# Altium PCB bs.PcbDoc (part 2 of 2)
Units mm, origin at the board's own origin, x right, y up, seen from the top; angles counter-clockwise.
Board outline 26 x 26 mm, 4 copper layers (Top Layer, Int1 (GND), Int2 (PWR), Bottom Layer), stack 0.801 mm thick; 54 components, 41 nets, 239 pads, 117 vias.
Unrouted connection lines stored in the file: 12.
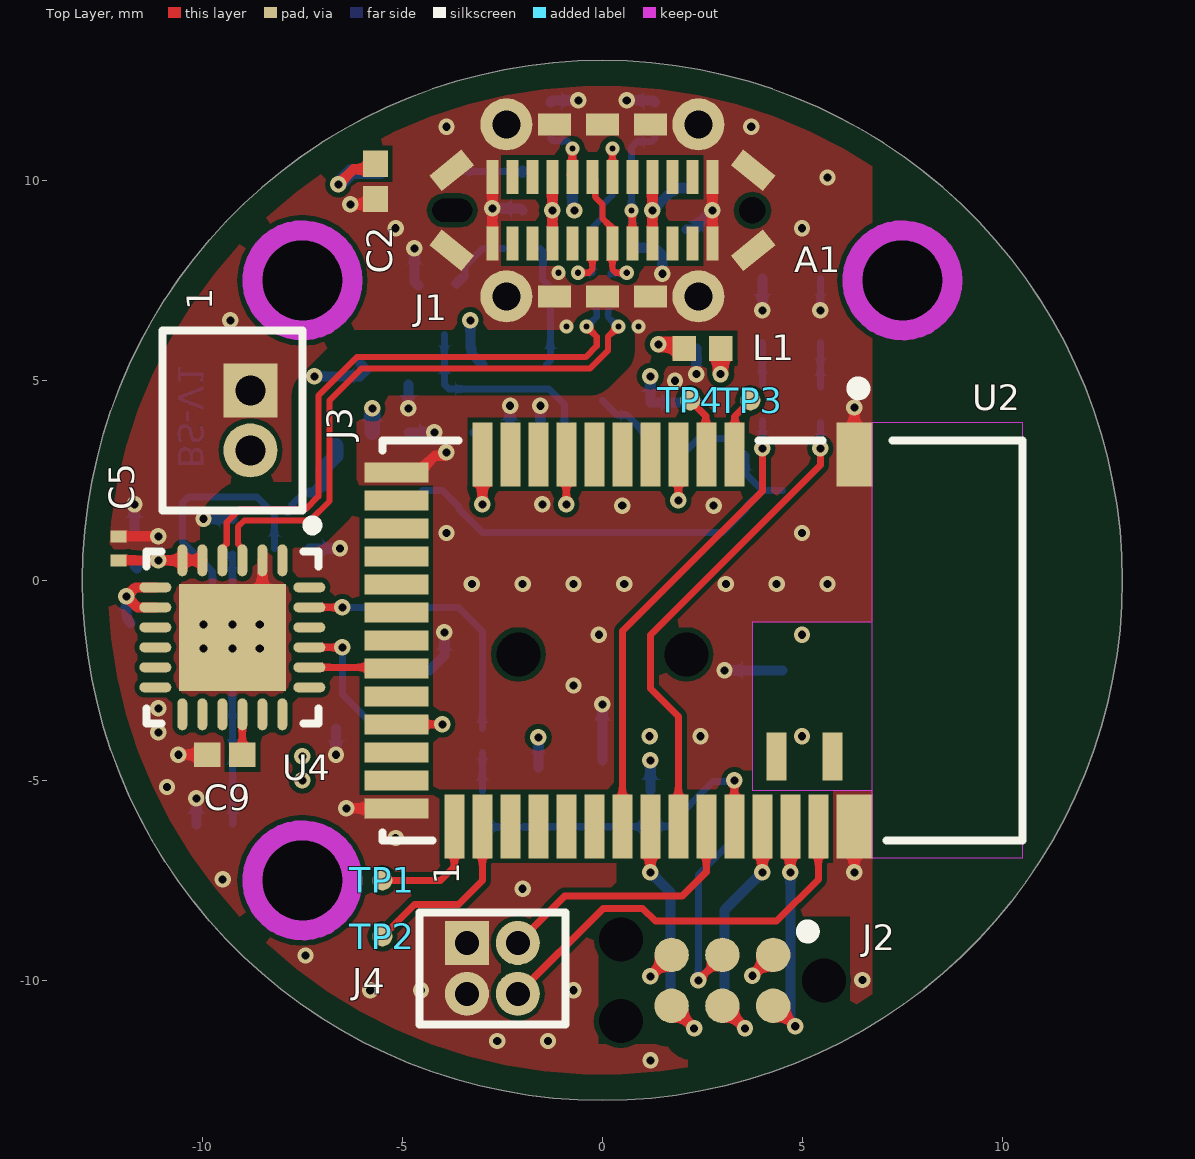
[diagram p0: Top Layer view]

## Part data (continued)
R3 R15: library part "47R 0402", "RES SMD 47 OHM 1% 1/16W 0402", Case/Package=0402, Case Code (Metric)=1005, Manufacturer=Yageo, Manufacturer Part Number=RC0402FR-0747RL, Max Operating Temperature=155°C, Max Power Dissipation=63mW, Min Operating Temperature=-55°C, Package Quantity=1, Supplier Part Number 1=311-47.0LRCT-ND, Temperature Coefficient=100ppm/°C, Tolerance=1%, Voltage Rating=50V, Case Code (Imperial)=0402, ClassName=SMT, ComponentLink1Description=https://datasheet.ciiva.com/11819/0900766b80c66297-11819509.pdf?src-supplier=RSComponents, ComponentLink1URL=https://datasheet.ciiva.com/11819/0900766b80c66297-11819509.pdf?src-supplier=RSComponents, ComponentLink2Description=https://datasheet.ciiva.com/2553/pyu-r-int-thick-7-2553221.pdf?src-supplier=Digi-Key, ComponentLink2URL=https://datasheet.ciiva.com/2553/pyu-r-int-thick-7-2553221.pdf?src-supplier=Digi-Key, ComponentLink3Description=https://datasheet.ciiva.com/2553/pyu-r-int-thick-7-2553222.pdf?src-supplier=Digi-Key, ComponentLink3URL=https://datasheet.ciiva.com/2553/pyu-r-int-thick-7-2553222.pdf?src-supplier=Digi-Key, ComponentLink4Description=https://datasheet.ciiva.com/2553/pyu-r-int-thick-7-2553223.pdf?src-supplier=Digi-Key, ComponentLink4URL=https://datasheet.ciiva.com/2553/pyu-r-int-thick-7-2553223.pdf?src-supplier=Digi-Key, ComponentLink5Description=https://datasheet.ciiva.com/12577/pyu-rc0402-51-rohs-l-6-r-12577592.pdf?src-supplier=Mouser, ComponentLink5URL=https://datasheet.ciiva.com/12577/pyu-rc0402-51-rohs-l-6-r-12577592.pdf?src-supplier=Mouser, ComponentLink6Description=https://datasheet.ciiva.com/15189/getdatasheetpartid-329266-15189467.pdf?src-supplier=Verical, ComponentLink6URL=https://datasheet.ciiva.com/15189/getdatasheetpartid-329266-15189467.pdf?src-supplier=Verical, ComponentLink7Description=https://datasheet.ciiva.com/17067/pyu-rc0402-51-rohs-l-6-r-17067470.pdf?src-supplier=Future+Electronics, ComponentLink7URL=https://datasheet.ciiva.com/17067/pyu-rc0402-51-rohs-l-6-r-17067470.pdf?src-supplier=Future+Electronics, Composition="Thick Film", Depth=0.5mm, Features="Moisture Resistant", Height=0.016inch, Lead Free="Lead Free", Length=1mm, Military Standard=Not, Number of Terminations=2, Packaging="Tape and Reel", Power Rating=63mW, Pricing 1="1 = 0.10000, 10 = 0.01600, 100 = 0.00670, 1000 = 0.00301, 2500 = 0.00261, 5000 = 0.00215 (USD)", REACH SVHC=Unknown, Resistance=47R, RoHS=Yes, Stock 1=2791305, Supplier 1=Digi-Key, Termination=SMD/SMT, Weight=2.3E-05oz, Width=0.02inch
R4 R11: library part "10k 0402", "RES SMD 10K OHM 1% 1/16W 0402", Case/Package=0402, Manufacturer="Yageo Phycomp", Manufacturer Part Number=RC0402FR-0710KL, Max Operating Temperature=155°C, Min Operating Temperature=-55°C, Power Rating=63mW, Resistance=10000R, Supplier Part Number 1=311-10.0KLRCT-ND, Temperature Coefficient=100ppm/°C, Tolerance=1%, Voltage Rating (DC)=50V, ClassName=SMT, ComponentLink1Description=http://www.farnell.com/datasheets/2167052.pdf?src-supplier=Farnell, ComponentLink1URL=http://www.farnell.com/datasheets/2167052.pdf?src-supplier=Farnell, ComponentLink2Description=http://www.yageo.com/documents/recent/PYu-RC_Group_51_RoHS_L_10.pdf?src-supplier=Digi-Key, ComponentLink2URL=http://www.yageo.com/documents/recent/PYu-RC_Group_51_RoHS_L_10.pdf?src-supplier=Digi-Key, ComponentLink3Description=http://www.farnell.com/datasheets/1738692.pdf?src-supplier=Element14, ComponentLink3URL=http://www.farnell.com/datasheets/1738692.pdf?src-supplier=Element14, ComponentLink4Description=http://www.farnell.com/datasheets/2167052.pdf?src-supplier=Newark, ComponentLink4URL=http://www.farnell.com/datasheets/2167052.pdf?src-supplier=Newark, ComponentLink5Description=http://www.farnell.com/datasheets/2167052.pdf?src-supplier=Element14, ComponentLink5URL=http://www.farnell.com/datasheets/2167052.pdf?src-supplier=Element14, ComponentLink6Description=http://www.farnell.com/datasheets/1784430.pdf?src-supplier=Element14, ComponentLink6URL=http://www.farnell.com/datasheets/1784430.pdf?src-supplier=Element14, ComponentLink7Description=http://documents.rs-components.com/techlib://itc_doclist_GB.htm?stockno=6185832&src-supplier=RSComponents, ComponentLink7URL=http://documents.rs-components.com/techlib://itc_doclist_GB.htm?stockno=6185832&src-supplier=RSComponents, Depth=0.5mm, Height=0.32mm, Lead Free="Lead Free", Length=1mm, Mount="Surface Mount", Number of Pins=2, Packaging="Cut Tape", Pricing 1="1 = 0.10000, 10 = 0.01600, 100 = 0.00670, 1000 = 0.00301, 2500 = 0.00261, 5000 = 0.00215 (USD)", REACH SVHC="No SVHC", RoHS=Yes, Stock 1=98435877, Supplier 1=Digi-Key, Width=500um
R5 R9 R16: library part "1k 0402", "RES SMD 1K OHM 1% 1/16W 0402", Case/Package=0402, Case Code (Metric)=1005, Manufacturer=Yageo, Manufacturer Part Number=RC0402FR-071KL, Max Operating Temperature=155°C, Min Operating Temperature=-55°C, Power Rating=62.5mW, Resistance=1kR, Supplier Part Number 1=311-1.00KLRCT-ND, Temperature Coefficient=100ppm/°C, Tolerance=1%, Voltage Rating=50V, Case Code (Imperial)=0402, ClassName=SMT, ComponentLink1Description=https://datasheet.ciiva.com/11819/0900766b80c66297-11819477.pdf?src-supplier=RSComponents, ComponentLink1URL=https://datasheet.ciiva.com/11819/0900766b80c66297-11819477.pdf?src-supplier=RSComponents, ComponentLink2Description=https://datasheet.ciiva.com/12666/pyu-rc0402-51-rohs-l-6-r-12666741.pdf?src-supplier=Mouser, ComponentLink2URL=https://datasheet.ciiva.com/12666/pyu-rc0402-51-rohs-l-6-r-12666741.pdf?src-supplier=Mouser, ComponentLink3Description=https://datasheet.ciiva.com/17063/pyu-rc0402-51-rohs-l-6-r-17063193.pdf?src-supplier=Future+Electronics, ComponentLink3URL=https://datasheet.ciiva.com/17063/pyu-rc0402-51-rohs-l-6-r-17063193.pdf?src-supplier=Future+Electronics, ComponentLink4Description=https://datasheet.ciiva.com/22747/1018594-22747513.pdf?src-supplier=Element14, ComponentLink4URL=https://datasheet.ciiva.com/22747/1018594-22747513.pdf?src-supplier=Element14, ComponentLink5Description=https://datasheet.ciiva.com/7849/1018594-7849869.pdf?src-supplier=Element14, ComponentLink5URL=https://datasheet.ciiva.com/7849/1018594-7849869.pdf?src-supplier=Element14, ComponentLink6Description=https://datasheet.ciiva.com/7983/1018594-7983502.pdf?src-supplier=Element14, ComponentLink6URL=https://datasheet.ciiva.com/7983/1018594-7983502.pdf?src-supplier=Element14, ComponentLink7Description=https://datasheet.ciiva.com/7849/1018594-7849871.pdf?src-supplier=Element14, ComponentLink7URL=https://datasheet.ciiva.com/7849/1018594-7849871.pdf?src-supplier=Element14, Composition="Thick Film", Depth=0.5mm, Height=0.32mm, Lead Free="Lead Free", Length=1mm, Military Standard=Not, Number of Pins=2, Packaging="Tape and Reel", Pricing 1="1 = 0.10000, 10 = 0.01600, 100 = 0.00670, 1000 = 0.00301, 2500 = 0.00261, 5000 = 0.00215 (USD)", REACH SVHC=Unknown, RoHS=Yes, Stock 1=72757571, Supplier 1=Digi-Key, Termination=SMD/SMT, Voltage Rating (DC)=50V, Width=0.5mm
R6: library part "2k 0402", "RES SMD 2K OHM 1% 1/16W 0402", Case/Package=0402, Case Code (Metric)=1005, Manufacturer=Yageo, Manufacturer Part Number=RC0402FR-072KL, Max Operating Temperature=155°C, Max Power Dissipation=63mW, Min Operating Temperature=-55°C, Package Quantity=1, Resistance=2kR, Supplier Part Number 1=311-2KLRCT-ND, Temperature Coefficient=100ppm/°C, Tolerance=1%, Voltage Rating=50V, Case Code (Imperial)=0402, ClassName=SMT, ComponentLink1Description=https://datasheet.ciiva.com/11808/0900766b80c66297-11808787.pdf?src-supplier=RSComponents, ComponentLink1URL=https://datasheet.ciiva.com/11808/0900766b80c66297-11808787.pdf?src-supplier=RSComponents, ComponentLink2Description=https://datasheet.ciiva.com/2453/pyu-r-int-thick-7-2453634.pdf?src-supplier=Digi-Key, ComponentLink2URL=https://datasheet.ciiva.com/2453/pyu-r-int-thick-7-2453634.pdf?src-supplier=Digi-Key, ComponentLink3Description=https://datasheet.ciiva.com/2453/pyu-r-int-thick-7-2453635.pdf?src-supplier=Digi-Key, ComponentLink3URL=https://datasheet.ciiva.com/2453/pyu-r-int-thick-7-2453635.pdf?src-supplier=Digi-Key, ComponentLink4Description=https://datasheet.ciiva.com/2453/pyu-r-int-thick-7-2453636.pdf?src-supplier=Digi-Key, ComponentLink4URL=https://datasheet.ciiva.com/2453/pyu-r-int-thick-7-2453636.pdf?src-supplier=Digi-Key, ComponentLink5Description=https://datasheet.ciiva.com/15189/getdatasheetpartid-358921-15189414.pdf?src-supplier=Verical, ComponentLink5URL=https://datasheet.ciiva.com/15189/getdatasheetpartid-358921-15189414.pdf?src-supplier=Verical, ComponentLink6Description=https://datasheet.ciiva.com/12667/pyu-rc0402-51-rohs-l-6-r-12667451.pdf?src-supplier=Mouser, ComponentLink6URL=https://datasheet.ciiva.com/12667/pyu-rc0402-51-rohs-l-6-r-12667451.pdf?src-supplier=Mouser, ComponentLink7Description=https://datasheet.ciiva.com/7983/1018594-7983517.pdf?src-supplier=Element14, ComponentLink7URL=https://datasheet.ciiva.com/7983/1018594-7983517.pdf?src-supplier=Element14, ComponentLink8Description=https://datasheet.ciiva.com/7849/1018594-7849934.pdf?src-supplier=Element14, ComponentLink8URL=https://datasheet.ciiva.com/7849/1018594-7849934.pdf?src-supplier=Element14, ComponentLink9Description=https://datasheet.ciiva.com/7849/1018594-7849935.pdf?src-supplier=Element14, ComponentLink9URL=https://datasheet.ciiva.com/7849/1018594-7849935.pdf?src-supplier=Element14, Composition="Thick Film", Depth=0.5mm, Features="Moisture Resistant", Height=0.016inch, Lead Free="Lead Free", Length=1mm, Military Standard=Not, Number of Terminations=2, Packaging="Tape and Reel", Power Rating=63mW, Pricing 1="1 = 0.10000, 10 = 0.01600, 100 = 0.00670, 1000 = 0.00301, 2500 = 0.00261, 5000 = 0.00215 (USD)", REACH SVHC=Unknown, RoHS=Yes, Stock 1=13397188, Supplier 1=Digi-Key, Termination=SMD/SMT, Voltage Rating (DC)=50V, Width=0.02inch, Working Voltage=50V
R7: library part "806k 0402", "RES SMD 806K OHM 1% 1/10W 0402", Case/Package=0402, Case Code (Metric)=1005, Manufacturer=Panasonic, Manufacturer Part Number=ERJ-2RKF8063X, Max Operating Temperature=155°C, Max Power Dissipation=100mW, Min Operating Temperature=-55°C, Package Quantity=10000, Resistance=806kR, Supplier Part Number 1=P806KLCT-ND, Temperature Coefficient=100ppm/°C, Tolerance=1%, Voltage Rating=50V, Case Code (Imperial)=0402, ClassName=SMT, ComponentLink1Description=https://datasheet.ciiva.com/16785/70260748-16785671.pdf?src-supplier=Allied+Electronics, ComponentLink1URL=https://datasheet.ciiva.com/16785/70260748-16785671.pdf?src-supplier=Allied+Electronics, ComponentLink2Description=https://datasheet.ciiva.com/24026/aoa0000ce2-24026935.pdf?src-supplier=Mouser, ComponentLink2URL=https://datasheet.ciiva.com/24026/aoa0000ce2-24026935.pdf?src-supplier=Mouser, ComponentLink3Description=https://datasheet.ciiva.com/9179/aoa0000ce2-9179930.pdf?src-supplier=Avnet, ComponentLink3URL=https://datasheet.ciiva.com/9179/aoa0000ce2-9179930.pdf?src-supplier=Avnet, ComponentLink4Description=https://datasheet.ciiva.com/22668/1678782-22668410.pdf?src-supplier=Element14, ComponentLink4URL=https://datasheet.ciiva.com/22668/1678782-22668410.pdf?src-supplier=Element14, ComponentLink5Description=https://datasheet.ciiva.com/16759/70260748-16759515.pdf?src-supplier=Allied+Electronics, ComponentLink5URL=https://datasheet.ciiva.com/16759/70260748-16759515.pdf?src-supplier=Allied+Electronics, ComponentLink6Description=https://datasheet.ciiva.com/7753/1678782-7753996.pdf?src-supplier=Element14, ComponentLink6URL=https://datasheet.ciiva.com/7753/1678782-7753996.pdf?src-supplier=Element14, ComponentLink7Description=https://datasheet.ciiva.com/9179/aoa0000ce2-9179932.pdf?src-supplier=Avnet, ComponentLink7URL=https://datasheet.ciiva.com/9179/aoa0000ce2-9179932.pdf?src-supplier=Avnet, Composition="Thick Film", Contact Plating=Tin, Depth=0.5mm, Features="Automotive AEC-Q200", Height=0.35mm, Length=1mm, Military Standard=Not, Mount="Surface Mount", Number of Terminations=2, Packaging="Tape and Reel", Power Rating=100mW, Pricing 1="1 = 0.10000, 10 = 0.04500, 100 = 0.01830, 1000 = 0.00823, 2500 = 0.00715, 5000 = 0.00590 (USD)", REACH SVHC="No SVHC", RoHS=Yes, Stock 1=231213, Supplier 1=Digi-Key, Termination=SMD/SMT, Voltage Rating (DC)=50V, Width=0.02inch
R8: library part "2M 0402", "RES SMD 2M OHM 1% 1/16W 0402", Case/Package=0402, Case Code (Metric)=1005, Manufacturer=Samsung, Manufacturer Part Number=RC1005F205CS, Max Operating Temperature=155°C, Max Power Dissipation=63mW, Min Operating Temperature=-55°C, Resistance=2MR, Supplier Part Number 1=1276-4293-1-ND, Temperature Coefficient=100ppm/°C, Tolerance=1%, Voltage Rating (DC)=50V, Case Code (Imperial)=0402, ClassName=SMT, ComponentLink1Description=https://datasheet.ciiva.com/26159/chip-resistor-150112-1-26159468.pdf?src-supplier=Digi-Key, ComponentLink1URL=https://datasheet.ciiva.com/26159/chip-resistor-150112-1-26159468.pdf?src-supplier=Digi-Key, ComponentLink2Description=https://datasheet.ciiva.com/26159/chip-resistor-150112-1-26159486.pdf?src-supplier=Digi-Key, ComponentLink2URL=https://datasheet.ciiva.com/26159/chip-resistor-150112-1-26159486.pdf?src-supplier=Digi-Key, Composition="Thick Film", Contact Plating=Tin, Features="Moisture Resistant", Height=0.016inch, Lead Free="Lead Free", Length=0.039inch, Number of Terminations=2, Packaging="Tape and Reel", Pricing 1="1 = 0.10000, 10 = 0.02000, 100 = 0.00830, 1000 = 0.00373, 2500 = 0.00324, 5000 = 0.00267 (USD)", Radiation Hardening=No, RoHS=Yes, Stock 1=975529, Supplier 1=Digi-Key, Width=0.02inch
R12: library part "0R 0402", "RES SMD 0 OHM JUMPER 1/16W 0402", Case/Package=0402, Case Code (Metric)=1005, Manufacturer=Yageo, Manufacturer Part Number=RC0402FR-070RL, Max Operating Temperature=155°C, Min Operating Temperature=-55°C, Power Rating=62.5mW, Resistance=0mR, Supplier Part Number 1=311-0.0LRCT-ND, Temperature Coefficient=200ppm/°C, Tolerance=1%, Voltage Rating=50V, Case Code (Imperial)=0402, ClassName=SMT, ComponentLink1Description=https://datasheet.ciiva.com/8896/pyu-rc0402-51-rohs-l-6-8896149.pdf?src-supplier=Avnet, ComponentLink1URL=https://datasheet.ciiva.com/8896/pyu-rc0402-51-rohs-l-6-8896149.pdf?src-supplier=Avnet, ComponentLink2Description=https://datasheet.ciiva.com/16790/pyu-rc0402-51-rohs-l-6-r-16790444.pdf?src-supplier=Future+Electronics, ComponentLink2URL=https://datasheet.ciiva.com/16790/pyu-rc0402-51-rohs-l-6-r-16790444.pdf?src-supplier=Future+Electronics, ComponentLink3Description=https://datasheet.ciiva.com/28419/pyu-rc0402-51-rohs-l-6-28419661.pdf?src-supplier=Avnet+Europe, ComponentLink3URL=https://datasheet.ciiva.com/28419/pyu-rc0402-51-rohs-l-6-28419661.pdf?src-supplier=Avnet+Europe, ComponentLink4Description=https://datasheet.ciiva.com/16869/pyu-rc0402-51-rohs-l-6-16869518.pdf?src-supplier=Avnet+Europe, ComponentLink4URL=https://datasheet.ciiva.com/16869/pyu-rc0402-51-rohs-l-6-16869518.pdf?src-supplier=Avnet+Europe, Composition="Thick Film", Contact Plating=Tin, Height=0.35mm, Lead Free="Lead Free", Length=1mm, Mount="Surface Mount", Packaging="Tape and Reel", Pricing 1="1 = 0.10000, 10 = 0.01400, 25 = 0.01000, 50 = 0.00780, 100 = 0.00570, 250 = 0.00436, 500 = 0.00348, 1000 = 0.00257, 5000 = 0.00184 (USD)", Radiation Hardening=No, RoHS=Yes, Stock 1=12597172, Supplier 1=Digi-Key, Termination=SMD/SMT, Width=0.5mm
R13: library part "100k 0402", "RES SMD 100K OHM 1% 1/16W 0402", Case/Package=0402, Case Code (Metric)=1005, Manufacturer=Yageo, Manufacturer Part Number=RC0402FR-07100KL, Max Operating Temperature=155°C, Max Power Dissipation=63mW, Min Operating Temperature=-55°C, Package Quantity=1, Resistance=100kR, Supplier Part Number 1=311-100KLRCT-ND, Temperature Coefficient=100ppm/°C, Tolerance=1%, Voltage Rating=50V, Case Code (Imperial)=0402, ClassName=SMT, ComponentLink1Description=https://datasheet.ciiva.com/11819/0900766b80c66297-11819452.pdf?src-supplier=RSComponents, ComponentLink1URL=https://datasheet.ciiva.com/11819/0900766b80c66297-11819452.pdf?src-supplier=RSComponents, ComponentLink2Description=https://datasheet.ciiva.com/2453/pyu-r-int-thick-7-2453361.pdf?src-supplier=Digi-Key, ComponentLink2URL=https://datasheet.ciiva.com/2453/pyu-r-int-thick-7-2453361.pdf?src-supplier=Digi-Key, ComponentLink3Description=https://datasheet.ciiva.com/2453/pyu-r-int-thick-7-2453362.pdf?src-supplier=Digi-Key, ComponentLink3URL=https://datasheet.ciiva.com/2453/pyu-r-int-thick-7-2453362.pdf?src-supplier=Digi-Key, ComponentLink4Description=https://datasheet.ciiva.com/2453/pyu-r-int-thick-7-2453363.pdf?src-supplier=Digi-Key, ComponentLink4URL=https://datasheet.ciiva.com/2453/pyu-r-int-thick-7-2453363.pdf?src-supplier=Digi-Key, ComponentLink5Description=https://datasheet.ciiva.com/22747/1018594-22747509.pdf?src-supplier=Element14, ComponentLink5URL=https://datasheet.ciiva.com/22747/1018594-22747509.pdf?src-supplier=Element14, ComponentLink6Description=https://datasheet.ciiva.com/15189/getdatasheetpartid-323696-15189334.pdf?src-supplier=Verical, ComponentLink6URL=https://datasheet.ciiva.com/15189/getdatasheetpartid-323696-15189334.pdf?src-supplier=Verical, ComponentLink7Description=https://datasheet.ciiva.com/16740/pyu-rc0402-51-rohs-l-6-r-16740567.pdf?src-supplier=Future+Electronics, ComponentLink7URL=https://datasheet.ciiva.com/16740/pyu-rc0402-51-rohs-l-6-r-16740567.pdf?src-supplier=Future+Electronics, ComponentLink8Description=https://datasheet.ciiva.com/12667/pyu-rc0402-51-rohs-l-6-r-12667930.pdf?src-supplier=Mouser, ComponentLink8URL=https://datasheet.ciiva.com/12667/pyu-rc0402-51-rohs-l-6-r-12667930.pdf?src-supplier=Mouser, Composition="Thick Film", Depth=0.5mm, Features="Moisture Resistant", Height=0.016inch, Lead Free="Lead Free", Length=0.039inch, Military Standard=Not, Number of Terminations=2, Packaging="Tape and Reel", Power Rating=63mW, Pricing 1="1 = 0.10000, 10 = 0.01600, 100 = 0.00670, 1000 = 0.00301, 2500 = 0.00261, 5000 = 0.00215 (USD)", REACH SVHC="No SVHC", RoHS=Yes, Stock 1=64634513, Supplier 1=Digi-Key, Termination=SMD/SMT, Width=0.02inch, Working Voltage=50V
R14: library part "3.57k 0402", "RES SMD 3.57K OHM 1% 1/10W 0402", Case/Package=0402, Case Code (Metric)=1005, Manufacturer=Panasonic, Manufacturer Part Number=ERJ-2RKF3571X, Max Operating Temperature=155°C, Max Power Dissipation=100mW, Min Operating Temperature=-55°C, Package Quantity=1, Resistance=3.57kR, Supplier Part Number 1=P3.57KLCT-ND, Temperature Coefficient=100ppm/°C, Tolerance=1%, Voltage Rating=50V, Case Code (Imperial)=0402, ClassName=SMT, ComponentLink1Description=https://datasheet.ciiva.com/24069/aoa0000ce2-24069909.pdf, ComponentLink1URL=https://datasheet.ciiva.com/24069/aoa0000ce2-24069909.pdf, ComponentLink2Description=https://datasheet.ciiva.com/28545/1694929-28545241.pdf, ComponentLink2URL=https://datasheet.ciiva.com/28545/1694929-28545241.pdf, ComponentLink3Description=https://datasheet.ciiva.com/7763/1678782-7763707.pdf, ComponentLink3URL=https://datasheet.ciiva.com/7763/1678782-7763707.pdf, ComponentLink4Description=https://datasheet.ciiva.com/30191/aoa0000ce2-30191243.pdf, ComponentLink4URL=https://datasheet.ciiva.com/30191/aoa0000ce2-30191243.pdf, ComponentLink5Description=https://datasheet.ciiva.com/16779/70260748-16779437.pdf, ComponentLink5URL=https://datasheet.ciiva.com/16779/70260748-16779437.pdf, ComponentLink6Description=https://datasheet.ciiva.com/22681/1678782-22681293.pdf, ComponentLink6URL=https://datasheet.ciiva.com/22681/1678782-22681293.pdf, Composition="Thick Film", Contact Plating=Tin, Depth=0.5mm, Height=0.016inch, Lead Free="Lead Free", Length=1mm, Military Standard=Not, Mount="Surface Mount", Number of Terminations=2, Packaging="Tape and Reel", Power Rating=100mW, Pricing 1="1=0.1, 10=0.043, 100=0.0176, 1000=0.00791, 2500=0.00686, 5000=0.00567 (USD)", REACH SVHC="No SVHC", Stock 1=676573, Supplier 1=Digi-Key, Termination=SMD/SMT, Voltage Rating (DC)=50V, Width=0.02inch
R17: library part "1.15k 0402", "RES SMD 1.15K OHM 1% 1/10W 0402", Case/Package=0402, Case Code (Metric)=1005, Manufacturer=Panasonic, Manufacturer Part Number=ERJ-2RKF1151X, Max Operating Temperature=155°C, Max Power Dissipation=100mW, Min Operating Temperature=-55°C, Package Quantity=1, Resistance=1.15kR, Supplier Part Number 1=P1.15KLCT-ND, Temperature Coefficient=100ppm/°C, Tolerance=1%, Voltage Rating=50V, Case Code (Imperial)=0402, ClassName=SMT, ComponentLink1Description=https://datasheet.ciiva.com/22721/1678782-22721221.pdf, ComponentLink1URL=https://datasheet.ciiva.com/22721/1678782-22721221.pdf, ComponentLink2Description=https://datasheet.ciiva.com/24027/aoa0000ce2-24027413.pdf, ComponentLink2URL=https://datasheet.ciiva.com/24027/aoa0000ce2-24027413.pdf, ComponentLink3Description=https://datasheet.ciiva.com/43467/1678782-43467317.pdf, ComponentLink3URL=https://datasheet.ciiva.com/43467/1678782-43467317.pdf, ComponentLink4Description=https://datasheet.ciiva.com/46373/1678782-46373832.pdf, ComponentLink4URL=https://datasheet.ciiva.com/46373/1678782-46373832.pdf, ComponentLink5Description=https://datasheet.ciiva.com/46373/1678782-46373833.pdf, ComponentLink5URL=https://datasheet.ciiva.com/46373/1678782-46373833.pdf, ComponentLink6Description=https://datasheet.ciiva.com/16768/70260748-16768765.pdf, ComponentLink6URL=https://datasheet.ciiva.com/16768/70260748-16768765.pdf, Composition="Thick Film", Contact Plating=Tin, Depth=0.5mm, Height=0.35mm, Lead Free="Lead Free", Length=1mm, Military Standard=Not, Mount="Surface Mount", Number of Terminations=2, Packaging="Tape and Reel", Power Rating=100mW, Pricing 1="1=0.1, 10=0.043, 100=0.0176, 1000=0.00791, 2500=0.00686, 5000=0.00567 (USD)", Radiation Hardening=No, REACH SVHC=Yes, Stock 1=99704, Supplier 1=Digi-Key, Termination=SMD/SMT, Voltage Rating (DC)=50V, Width=0.5mm
SW1: library part "Pushbutton Switch, Blue Illuminated", "SWITCH TACTILE SPST-NO 50MA 12V", Contact Current Rating=50mA, Manufacturer="TE Connectivity Alcoswitch", Operating Force=100gf, Supplier Part Number 1=450-2207-1-ND, ClassName=SMT, ComponentLink1Description=http://www.farnell.com/datasheets/2074198.pdf?src-supplier=Element14, ComponentLink1URL=http://www.farnell.com/datasheets/2074198.pdf?src-supplier=Element14, Contact Material=Brass, Contact Plating=Silver, Illumination Type=Illuminated, Manufacturer Part Number=FSMIJM61AB04, Mount="Surface Mount", Pricing 1="1 = 3.90000, 10 = 3.74600, 25 = 3.44600, 50 = 2.99660, 100 = 2.84680 (USD)", REACH SVHC="No SVHC", RoHS=No, Stock 1=1218, Supplier 1=Digikey
TP1 TP2 TP3 TP4: "0.5mm SMT Test Point", ClassName=Testpoints
U1: "CMC 100MA 2LN 35 OHM SMD ESD", Manufacturer=Panasonic, Supplier Part Number 1=P19421CT-ND, ClassName="SMT,Sensitive Exception", Manufacturer Part Number=EXC-14CS350H, Pricing 1="1 = 0.22000, 10 = 0.20200, 100 = 0.13490, 500 = 0.11242, 1000 = 0.09444, 2500 = 0.08095 (USD)", RoHS=No, Stock 1=12872, Supplier 1=Digi-Key
U2: "MDBT42Q NRF52832 BASED BLE MODUL", Manufacturer="Seeed Studio", Manufacturer Part Number=317030213, Supplier Part Number 1=1597-1434-ND, ClassName="SMT,Sensitive Exception", ComponentLink1Description=http://statics3.seeedstudio.com/assets/file/bazaar/product/MDBT42Q-Version_B.pdf?src-supplier=Digi-Key, ComponentLink1URL=http://statics3.seeedstudio.com/assets/file/bazaar/product/MDBT42Q-Version_B.pdf?src-supplier=Digi-Key, Pricing 1="1 = 10.10000 (USD)", RoHS=No, Stock 1=333, Supplier 1=Digi-Key
U3: "IC CONTROLLR LI-ION 4.2V SOT23-5", Case/Package=SOT-23, Manufacturer=Microchip, Max Charge Current=500mA, Max Operating Temperature=85°C, Max Output Voltage=4.232V, Max Supply Voltage=6V, Min Operating Temperature=-40°C, Min Output Voltage=4.168V, Min Supply Voltage=3.75V, Output Voltage=4.2V, Package Quantity=3000, Supplier Part Number 1=MCP73831T-2ATI/OTCT-ND, ClassName=SMT, ComponentLink1Description=https://datasheet.ciiva.com/26344/651522-da-01-en-contr-mcp73831t-2ati-ot-sot-23-5-mcp-26344457.pdf?src-supplier=Conrad, ComponentLink1URL=https://datasheet.ciiva.com/26344/651522-da-01-en-contr-mcp73831t-2ati-ot-sot-23-5-mcp-26344457.pdf?src-supplier=Conrad, ComponentLink2Description=https://datasheet.ciiva.com/1931/21984e-1931956.pdf?src-supplier=Digi-Key, ComponentLink2URL=https://datasheet.ciiva.com/1931/21984e-1931956.pdf?src-supplier=Digi-Key, ComponentLink3Description=https://datasheet.ciiva.com/1931/21984e-1931957.pdf?src-supplier=Digi-Key, ComponentLink3URL=https://datasheet.ciiva.com/1931/21984e-1931957.pdf?src-supplier=Digi-Key, ComponentLink4Description=https://datasheet.ciiva.com/1931/21984e-1931958.pdf?src-supplier=Digi-Key, ComponentLink4URL=https://datasheet.ciiva.com/1931/21984e-1931958.pdf?src-supplier=Digi-Key, ComponentLink5Description=https://datasheet.ciiva.com/17299/21984e-17299304.pdf?src-supplier=Avnet+Europe, ComponentLink5URL=https://datasheet.ciiva.com/17299/21984e-17299304.pdf?src-supplier=Avnet+Europe, ComponentLink6Description=https://datasheet.ciiva.com/1137/630369-1137804.pdf?src-supplier=Element14, ComponentLink6URL=https://datasheet.ciiva.com/1137/630369-1137804.pdf?src-supplier=Element14, ComponentLink7Description=https://datasheet.ciiva.com/8039/630369-8039388.pdf?src-supplier=Element14, ComponentLink7URL=https://datasheet.ciiva.com/8039/630369-8039388.pdf?src-supplier=Element14, ComponentLink8Description=https://datasheet.ciiva.com/16217/filehandler-aspxddocname-en025112-16217052.pdf?src-supplier=Future+Electronics, ComponentLink8URL=https://datasheet.ciiva.com/16217/filehandler-aspxddocname-en025112-16217052.pdf?src-supplier=Future+Electronics, ComponentLink9Description=https://datasheet.ciiva.com/3213/21984e-3213405.pdf?src-supplier=Avnet, ComponentLink9URL=https://datasheet.ciiva.com/3213/21984e-3213405.pdf?src-supplier=Avnet, Height=1.3mm, Lead Free="Lead Free", Length=3.1mm, Manufacturer Part Number=MCP73831T-2ATI/OT, Max Output Current=500mA, Mount="Surface Mount", Number of Cells=1, Number of Pins=5, Output Current=500mA, Packaging="Tape and Reel", Pricing 1="1 = 0.58000, 25 = 0.48400, 100 = 0.43260 (USD)", REACH SVHC="No SVHC", RoHS=Yes, Stock 1=22234, Supplier 1=Digi-Key, Width=1.8mm
U4: "IC SGL USB-TO-UART BRIDGE 24QFN", Case/Package="QFN EP", Manufacturer="Silicon Labs", Max Operating Temperature=85°C, Max Supply Voltage=3.6V, Min Operating Temperature=-40°C, Min Supply Voltage=3V, Operating Supply Current=17mA, Operating Supply Voltage=3.3V, Package Quantity=1500, Supplier Part Number 1=336-4146-1-ND, ClassName="SMT,Sensitive Exception", ComponentLink1Description=https://datasheet.ciiva.com/14939/cp2104-14939979.pdf?src-supplier=Digi-Key, ComponentLink1URL=https://datasheet.ciiva.com/14939/cp2104-14939979.pdf?src-supplier=Digi-Key, ComponentLink2Description=https://datasheet.ciiva.com/16639/cp2104-16639756.pdf?src-supplier=Avnet+Europe, ComponentLink2URL=https://datasheet.ciiva.com/16639/cp2104-16639756.pdf?src-supplier=Avnet+Europe, ComponentLink3Description=https://datasheet.ciiva.com/15150/getdatasheetpartid-711722-15150533.pdf?src-supplier=Verical, ComponentLink3URL=https://datasheet.ciiva.com/15150/getdatasheetpartid-711722-15150533.pdf?src-supplier=Verical, Contact Plating=Tin, Data Rate=2Mbps, Interface=UART, Manufacturer Part Number=CP2104-F03-GMR, Mount="Surface Mount", Number of Channels=1, Number of I/Os=4, Number of Pins=24, Packaging="Tape and Reel", Pricing 1="1 = 1.65000, 25 = 1.58640, 100 = 1.58360 (USD)", Radiation Hardening=No, RoHS=Yes, Stock 1=20484, Supplier 1=Digi-Key, Weight=0.001764oz
U5: "ULTRA LOW NOISE 0.5A LDO WITH P", Manufacturer="Texas Instruments", Max Operating Temperature=125°C, Min Operating Temperature=-40°C, Supplier Part Number 1=296-48316-1-ND, ClassName=SMT, Manufacturer Part Number=TPS7A9001DSKR, Pricing 1="1=1.6, 10=1.441, 100=1.1584, 500=0.95172, 1000=0.78857 (USD)", Stock 1=105, Supplier 1=Digi-Key

## Free pads (board coordinates)
  round 0 hole 2 unplated: 0(-7.5,-7.5) 0(-7.5,7.5) 0(7.5,7.5)

## Via types
v1: diameter 0.406, hole 0.203, Top Layer to Bottom Layer, tented both sides, 107 vias
v2: diameter 0.356, hole 0.152, Top Layer to Bottom Layer, tented both sides, 10 vias

## Nets (pads, with @x,y where several pads share a name; then routed paths per layer and width w, separated by ;. In a path a pad name is that pad's centre, name@x,y a point inside that pad or via, vN(x,y) a via of type N, cw(c..) or ccw(c..) an arc to the next point about the centre after c; other vN are vias at no path point)
3V3: C1.2 C11.2 C12.2 D3.1 J2.1 R3.2 R4.2 R11.2 R14.2 U2.11 U5.1 U5.2 | length 7.4
  Top Layer w0.254: v1(-3,1.9) U2.11 U2.11@-2.9,3.25 ; v1@3.735,-9.9 v1(3.75,-9.885) J2.1
  Bottom Layer w0.254: C1.2 -3.183,3.7 -3,3.517 v1(-3,1.9) ; D3.1 v1(-1.6,-3.925) ; R11.2 v1(1.2,-4.5) ; v1(1.2,5.1) R3.2 R4.2
  other v1: -7.5,-5 -7.5,-4.4
BRG_VPP: C9.2 U4.16 | length 1.1
  Top Layer w0.178: U4.16 C9.2 C9.2@-8.96,-4.4
CC1: D7.2 J1.A5 R1.2 | length 3.6
  Top Layer w0.178: v2(0.725,9.248) 0.75,9.223 J1.A5
  Bottom Layer w0.178: D7.2 0.75,9.223 v2(0.725,9.248) 0.725,10.825 0.872,10.972 1.232,10.972 R1.2
CC2: D1.2 J1.B5 R2.2 | length 2.1
  Top Layer w0.178: J1.B5@-0.811,10.141 J1.B5 v2(-0.75,10.8)
  Bottom Layer w0.178: R2.2 -1.243,10.993 -0.9,10.993 -0.75,10.843 v2(-0.75,10.8) D1.2
CHG_PROG: R6.2 U3.5 | length 1.8
  Bottom Layer w0.127: U3.5@-3.75,10.225 U3.5@-3.735,10.24
  Bottom Layer w0.178: U3.5 R6.2@-2.034,10.225
  Bottom Layer w0.254: U3.5@-3.75,10.225 U3.5@-3.716,10.191 ; R6.2@-2.034,10.225 R6.2 ; R6.2@-2.015,10.225 R6.2@-2,10.24
CHG_STAT: R5.2 U3.1 | length 2
  Bottom Layer w0.178: U3.1@-3.7,7.425 U3.1@-3.539,7.586 ; U3.1 -3.439,7.586 -3.439,7.853 -2.992,8.3 R5.2@-2.46,8.3
DFU: J4.2 U2.34 | length 6.6
  Top Layer w0.178: J4.2 -0.945,-7.895 1.989,-7.895 2.6,-7.284 U2.34
DTR: C8.2 U4.23 | length 7
  Top Layer w0.178: U4.23 v1(-6.5,-0.675)
  Bottom Layer w0.178: v1(-6.5,-0.675) -3.6,-0.675 -3,-1.275 C8.2
DTR_RC: C8.1 R12.1 | length 1
  Bottom Layer w0.178: R12.1 C8.1
FB: C11.1 R14.1 R17.2 U5.3 | length 3.6
  Bottom Layer w0.178: R17.2 -9.24,-6.09 C11.1 -9.25,-4.89 R14.1 U5.3@-9.25,-2.48
FRST: J4.4 U2.38 | length 10.3
  Top Layer w0.178: J4.4 0.02,-8.2 1.007,-8.2 1.326,-8.519 4.355,-8.519 5.4,-7.474 U2.38
GND: C1.1 C2.1 C3.1 C4.1 C5.1 C6.1 C7.1 C9.1 C10.1 C12.1 C13.1 C14.1 D1.1 D5.1 D6.1 D7.1 D8.2 J1.A1 J1.A12 J1.B1 J1.B12 J1.SHA1 J1.SHA2 J1.SHA3 J1.SHA4 J1.SHA5 J1.SHA6 J1.SHA7 J1.SHB1 J1.SHB2 J1.SHB3 J1.SHB4 J1.SHB5 J1.SHB6 J1.SHB7 J2.5 J3.1 J4.1 J4.3 R1.1 R2.1 R6.1 R8.1 R13.1 R17.1 SW1.3 SW1.4 SW1.5 U1.1 U1.4 U2.1 U2.12 U2.24 U2.39 U3.2 U4.2 U4.25 U5.4 U5.5 U5.6 U5.11 | length 35.3
  Top Layer w0.254: C5.1 -11.101,1.101 v1(-11.1,1.1) ; v1(-10.6,-4.36) C9.1 ; v1(-8.566,-1.1) -8.5,-1.034 U4.2 ; v1(-6.4,-5.7) U2.24 ; v1@-6.311,9.389 v1(-6.3,9.4) -5.81,9.4 C2.1 ; U2.12 -4.6,2.7 -4.184,3.116 -3.958,3.116 -3.9,3.174 v1(-3.9,3.2) ; J1.A12 v1(-2.75,9.3) J1.B1 ; v1(1.2,-9.9) 1.2,-9.895 J2.5 ; J1.A1 v1(2.75,9.25) J1.B12 ; v1(6.3,-7.3) U2.39 ; U2.1 v1(6.3,4.319)
  Top Layer w0.508: J1.SHA6@-2.614,7.1 J1.SHA6 ; J1.SHB2@-2.614,11.4 J1.SHB2 ; J1.SHA2 J1.SHA2@2.614,7.1 ; J1.SHB6 J1.SHB6@2.614,11.4
  Bottom Layer w0.178: v1(5.45,6.75) D5.1
  Bottom Layer w0.254: C4.1 v1(-11.698,1.901) ; U5.11@-10.25,-1.35 U5.6@-10.25,-0.37 ; R17.1 v1(-10.15,-5.45) ; v1(-9.969,1.54) C13.1 ; U5.11@-9.67,-1.425 U5.11 ; C10.1 v1(-6.56,0.8) ; v1(-7.2,5.1) -6.06,5.1 C3.1 C3.1@-6.04,5.4 ; v1(-6.66,-4.36) C12.1 ; R13.1 v1(-4.2,3.7) ; v1(-4.85,4.3) R8.1 ; v1(-4.7,8.3) -4.7,7.475 U3.2 ; SW1.4 -4.323,-2.25 -3.95,-1.877 v1(-3.95,-1.3) ; v1(-2.75,9.3) -2.05,9.3 R6.1@-2,9.25 ; C1.1 -2.31,4.392 -2.306,4.388 v1(-2.306,4.365) ; C7.1 v1(-1.55,4.365) ; R2.1 -1.25,12 v1(-0.6,12) ; D1.1 -0.75,9.339 -0.7,9.289 v1(-0.7,9.248) ; SW1.5 v1(0,-3.1) ; v1(0.61,12) 1.26,12 R1.1 ; D7.1 1.31,8.315 1.5,8.125 v1(1.5,7.665) ; D8.2 2.325,8.775 2.423,8.873 2.423,8.932 2.741,9.25 v1(2.75,9.25) ; v1(2.35,5.155) C14.1 ; v1(3.055,-2.25) SW1.3 ; v1(4,6.75) D6.1
  other v1: 1.202,-12 -2.628,-11.518 -1.358,-11.518 -5.803,-10.248 -4.533,-10.248 -0.723,-10.248 6.5,-9.993 -7.421,-9.38 -1.993,-7.708 -9.494,-7.474 -5.168,-6.438 -10.883,-5.168 1.182,-3.898 2.452,-3.898 4.992,-3.898 -11.1,-3.8 -11.1,-3.2 -0.723,-2.628 -9.969,-1.7 -9.25,-1.7 -8.566,-1.7 -0.088,-1.358 4.992,-1.358 -9.969,-1.1 -9.25,-1.1 -3.263,-0.088 -1.993,-0.088 -0.723,-0.088 0.547,-0.088 3.087,-0.088 4.357,-0.088 5.627,-0.088 -3.898,1.182 4.992,1.182 0.498,1.868 2.783,1.868 -1.5,1.9 1.817,4.992 -9.3,6.5 -5.168,8.802 4.992,8.802 5.627,10.072 -3.898,11.342 3.722,11.342
  other v2: -0.9,6.35 0.9,6.35 -1.1,7.69
NetD2_1: D2.1 R5.1 | length 3.1
  Bottom Layer w0.178: R5.1@-1.56,8.3 -1.484,8.224 -1.484,7.862 -1.494,7.853 -1.494,7.527 -1.3,7.333 -1.3,5.5 D2.1
NetD5_2: D5.2 R15.1 | length 1.1
  Bottom Layer w0.178: R15.1 D5.2
NetD6_2: D6.2 R16.1 | length 1.1
  Bottom Layer w0.178: R16.1 D6.2
NetR3_1: R3.1 SW1.6 | length 1.6
  Bottom Layer w0.178: SW1.6 SW1.6 0.361,4.137 0.613,4.137 R3.1
nRST: D3.2 J2.3 R11.1 R12.2 U2.35 | length 14.2
  Top Layer w0.178: v1(2.4,-10) 3,-9.4 J2.3@3,-9.38 ; U2.35 v1(3.3,-5)
  Bottom Layer w0.178: R12.2 -1.61,-6.165 D3.2 -1.585,-6.16 1.19,-6.16 R11.1 1.646,-6.15 2.769,-5.027 3.273,-5.027 v1(3.3,-5) 3.3,-6.45 2.4,-7.35 v1(2.4,-10)
SORRY: R4.1 SW1.1 SW1.2 U2.4 | length 15.5
  Top Layer w0.178: v1(1.9,2) U2.4
  Bottom Layer w0.178: SW1.2 -4,2.25 -3.589,1.839 -3.589,1.789 -3,1.2 3,1.2 3.589,1.789 3.589,1.839 SW1.1@4,2.25 ; v1(1.9,2) 1.9,3.05 R4.1 3.157,3.55 3.589,3.118 3.589,2.661 SW1.1@4,2.25 ; SW1.1 SW1.1@4.249,2.25 ; SW1.1@4,2.25 SW1.1@4.249,2.25 ; SW1.1@4,2.25 SW1.1@4.249,2.25
SS: C13.2 U5.8 | length 1.2
  Bottom Layer w0.178: C13.2@-9.4,0.66 C13.2@-9.25,0.51 ; U5.8@-9.25,-0.37 U5.8 C13.2@-9.25,0.51 ; C13.2 C13.2@-9.25,0.51
SWCLK: J2.4 U2.36 | length 6.5
  Top Layer w0.254: J2.4 v1(3.565,-11.2) ; v1(4,-7.3) U2.36
  Bottom Layer w0.254: v1(3.565,-11.2) 3.05,-10.685 3.05,-8.25 v1(4,-7.3)
SWDIO: J2.2 U2.37 | length 5.8
  Top Layer w0.254: J2.2 4.31,-10.635 v1(4.822,-11.147) ; v1(4.7,-7.3) U2.37
  Bottom Layer w0.254: v1(4.7,-7.3) 4.7,-10.984 4.822,-11.106 v1@4.822,-11.111
SWO: J2.6 U2.32 | length 6.3
  Top Layer w0.254: v1(1.2,-7.3) U2.32 ; J2.6 v1(2.295,-11.2)
  Bottom Layer w0.254: v1(1.2,-7.3) 1.7,-7.8 1.7,-10.605 v1(2.295,-11.2)
UART_RX: R9.1 U2.21 | length 2
  Top Layer w0.178: U2.21 v1(-4,-3.6)
  Bottom Layer w0.178: R9.1 v1(-4,-3.6)
UART_RX_R: R9.2 U4.21 | length 3.1
  Top Layer w0.178: U4.21 v1(-6.5,-1.675)
  Bottom Layer w0.178: v1(-6.5,-1.675) -6.5,-2.85 R9.2
UART_TX: U2.19 U4.20 | length 2.2
  Top Layer w0.178: U4.20 -5.175,-2.175 U2.19
USB_IN_N: J1.A7 J1.B7 U1.2 | length 5.5
  Top Layer w0.152: v2@-0.625,7.69 v2@-0.623,7.692 ; v2(-0.61,7.69) -0.339,7.69 -0.25,7.779 J1.A7 ; J1.B7 v2(0.25,10.8)
  Bottom Layer w0.152: v2@-0.625,7.69 v2(-0.61,7.69) -0.25,7.69 -0.25,8.812 -0.002,9.06 -0.002,9.375 0.25,9.627 v2(0.25,10.8)
USB_IN_P: J1.A6 J1.B6 U1.3 | length 3.4
  Top Layer w0.152: J1.B6 -0.176,10.006 -0.176,9.576 0,9.4 0,9.051 0.25,8.801 J1.A6 0.25,7.779 0.339,7.69 v2(0.61,7.69)
  Bottom Layer w0.152: U1.3 0.2,7.665 0.224,7.689 0.249,7.689 0.25,7.69 v2(0.61,7.69)
USB_N: U1.6 U4.4 | length 14.9
  Top Layer w0.152: U4.4 -9.5,0.801 -9.39,0.912 -9.39,1.452 -9.062,1.779 -7.421,1.779 -7.1,2.1 -7.1,4.616 -6.136,5.579 -0.421,5.579 -0.14,5.86 -0.14,6.09 v2(-0.4,6.35)
  Bottom Layer w0.152: v2(-0.4,6.35) -0.377,6.35 -0.14,6.587 -0.14,6.835 -0.2,6.895 U1.6
USB_P: U1.5 U4.3 | length 14.9
  Top Layer w0.152: U4.3 -9,0.801 -9.11,0.912 -9.11,1.336 -8.947,1.5 -7.305,1.5 -6.821,1.984 -6.821,4.5 -6.021,5.3 -0.305,5.3 0.14,5.745 0.14,6.09 v2(0.4,6.35)
  Bottom Layer w0.152: U1.5 0.2,6.895 0.14,6.835 0.14,6.587 0.377,6.35 v2(0.4,6.35)
USER_IO0: TP1.1 U2.25 | length 2.9
  Top Layer w0.178: TP1.1 -4.05,-7.5 -3.7,-7.15 U2.25
USER_IO1: TP2.1 U2.26 | length 4.4
  Top Layer w0.178: TP2.1 -4.7,-8.1 -3.6,-8.1 -3,-7.5 U2.26
USER_IO2: TP3.1 U2.2 | length 1.5
  Top Layer w0.178: U2.2 3.313,3.163 3.313,4.113 TP3.1
USER_IO3: TP4.1 U2.3 | length 1.5
  Top Layer w0.178: TP4.1 2.584,4.113 2.584,3.166 U2.3
USER_LED0: R16.2 U2.31 | length 11.6
  Top Layer w0.178: U2.31 0.5,-1.264 4,2.236 v1(4,3.3)
  Bottom Layer w0.178: v1(4,3.3) R16.2
USER_LED1: R15.2 U2.33 | length 12.1
  Top Layer w0.178: U2.33 1.9,-3.4 1.2,-2.7 1.2,-1.365 5.45,2.885 v1(5.45,3.3) ; v1@5.496,3.296 v1@5.5,3.3
  Bottom Layer w0.178: v1(5.45,3.3) R15.2
VBAT: C3.2 J3.2 Q1.3 R7.2 U3.3
VBAT_MON: C7.2 R7.1 R8.2 U2.8 | length 8.2
  Top Layer w0.178: v1(-0.9,1.9) U2.8
  Bottom Layer w0.178: R7.1 R8.2 -3.834,4.784 -1.334,4.784 -0.95,4.4 C7.2 -0.9,3.7 v1(-0.9,1.9)
VBUS: C2.2 C6.2 C14.2 D2.2 D4.2 L1.2 Q1.1 R13.2 U3.4 U4.7 U4.8 | length 7.9
  Top Layer w0.254: U4.8 -11.625,-0.675 v1(-11.9,-0.4) -11.675,-0.175 U4.7 ; v1(-6.6,9.9) -6.223,10.277 -5.794,10.277 -5.675,10.396 C2.2 ; v1(2.955,5.155) v1@3,5.11
  Top Layer w0.381: v1(2.955,5.155) L1.2
  Bottom Layer w0.254: v1(-11.9,-0.4) -11.9,-0.819 ccw(c-11.559,-0.819) C6.2 ; v1(-3.3,6.5) -3.3,5.822 -3.273,5.795 -3.273,5.673 D2.2 ; C14.2 2.955,5.795 v1(2.955,5.155)
  Bottom Layer w0.381: v1(-6.6,9.9) -6.275,10.225 U3.4 ; R13.2 v1(-5.75,4.3)
VBUS_IN: D8.1 J1.A4 J1.A9 J1.B4 J1.B9 L1.1 | length 5.3
  Top Layer w0.254: J1.A9 v1(-1.25,9.25) J1.B4 ; J1.A4 v1(1.25,9.25) J1.B9
  Top Layer w0.381: v1(1.4,5.9) 1.405,5.895 1.95,5.895 L1.1
  Bottom Layer w0.254: v1(1.25,9.25) 1.727,9.727 1.777,9.727 1.875,9.825 D8.1 2.072,9.797 D8.1@1.875,9.797
VIN_LDO: C10.2 D4.1 Q1.2 U5.7 U5.9 U5.10 | length 8.2
  Bottom Layer w0.178: U5.7 -9.75,0.215 -10.5,0.965 -10.5,1.939 -10.352,2.086 -8.636,2.086 -8.2,1.65 C10.2 ; -7.865,1.7 -7.761,1.804 -7.761,1.889 -7.45,2.2 D4.1
  Bottom Layer w0.254: D4.1 -7.2,2.2 D4.1@-6.99,2.41 ; Q1.2@-6.66,3.366 Q1.2
  Bottom Layer w0.381: D4.1@-6.99,2.41 -6.99,2.785 -6.66,3.115 Q1.2@-6.66,3.366
VIO: C4.2 C5.2 U4.5 U4.6 | length 2.8
  Top Layer w0.254: C5.2 C5.2 v1(-11.1,0.5) U4.6 U4.5
  Bottom Layer w0.254: C4.2@-11.638,0.3 C4.2 cw(c-11.36,0.022) -11.36,0.5 v1(-11.1,0.5)
pads on no net: J1.0 J1.A2 J1.A3 J1.A8 J1.A10 J1.A11 J1.B2 J1.B3 J1.B8 J1.B10 J1.B11 J2.0 SW1.0 U2.5 U2.6 U2.7 U2.9 U2.10 U2.13 U2.14 U2.15 U2.16 U2.17 U2.18 U2.20 U2.22 U2.23 U2.27 U2.28 U2.29 U2.30 U2.40 U2.41 U4.1 U4.9 U4.10 U4.11 U4.12 U4.13 U4.14 U4.15 U4.17 U4.18 U4.19 U4.22 U4.24

## Polygon pours and split planes (outlines as drawn)
GND on Bottom Layer "GND_L04_P016" (solid, remove dead copper, pour order 16): 13.6,13.3 13.6,-12.788 -12.788,-12.788 -12.788,13.3
VIN_LDO on Bottom Layer "VIN_LDO_L04_P010" (solid, pour order 10): -6.8,1.277 -8,0.077 -8,-0.7 -8.1,-0.8 -8.925,-0.8 -8.925,1.575 -7.9,2.6 -6.8,2.6
VBAT on Bottom Layer "VBAT_L04_P004" (solid, pour order 4): -8.35,11.2 -4.5,7.35 -4.5,5.8 -4.6,5.7 -6.5,5.7 -7,5.2 -7,2.45 -7.15,2.3 -12.788,2.3 -12.788,11.2
GND on Bottom Layer "GND_L04_P014" (solid, pour order 14): -10.7,-4.1 -9.5,-2.9 -9.5,-0.9 -11.5,-0.9 -12.2,-1.6 -12.2,-3.981 -12.081,-4.1
3V3 on Bottom Layer "3V3_L04_P012" (solid, pour order 12): -9,-2.8 -9,-2.2 -8.9,-2.1 -7.2,-2.1 -7.1,-2.2 -7.1,-5.207 -7.193,-5.3 -8.7,-5.3 -8.8,-5.2 -8.8,-3.107 -9.007,-2.9
VBUS on Bottom Layer "VBUS_L04_P002" (solid, pour order 2): -5.9,1.7 -5.8,1.8 -5.8,2.9 -5.4,3.3 -5.4,4.5 -5.5,4.6 -6.8,4.6 -6.9,4.5 -6.9,1.8 -6.8,1.7
GND on Top Layer "GND_L01_P018" (solid, remove dead copper, pour order 18): 13.544,13.304 13.544,-12.784 -12.845,-12.784 -12.845,13.304
GND on Int1 (GND) (split plane): 0.49,12.482 0.98,12.453 1.468,12.405 1.954,12.338 2.437,12.252 2.916,12.147 3.391,12.023 3.86,11.88 4.324,11.72 4.78,11.541 5.23,11.344 5.671,11.13 6.104,10.899 6.527,10.651 6.75,10.508 6.75,-10.508 6.527,-10.651 6.104,-10.899 5.671,-11.13 5.23,-11.344 4.78,-11.541 4.324,-11.72 3.86,-11.88 3.391,-12.023 2.916,-12.147 2.437,-12.252 1.954,-12.338 1.468,-12.405 0.98,-12.453 0.49,-12.482 0.02,-12.491 0,-12.49 -0.02,-12.491 -0.49,-12.482 -0.98,-12.453 -1.468,-12.405 -1.954,-12.338 -2.437,-12.252 -2.916,-12.147 -3.391,-12.023 -3.86,-11.88 -4.324,-11.72 -4.78,-11.541 -5.23,-11.344 -5.671,-11.13 -6.104,-10.899 -6.527,-10.651 -6.94,-10.387 -7.343,-10.106 -7.734,-9.81 -8.113,-9.499 -8.479,-9.173 -8.833,-8.833 -9.173,-8.479 -9.499,-8.113 -9.81,-7.734 -10.106,-7.343 -10.387,-6.94 -10.651,-6.527 -10.899,-6.104 -11.13,-5.671 -11.344,-5.23 -11.541,-4.78 -11.72,-4.324 -11.88,-3.86 -12.023,-3.391 -12.147,-2.916 -12.252,-2.437 -12.338,-1.954 -12.405,-1.468 -12.453,-0.98 -12.482,-0.49 -12.491,-0.02 -12.49,0 -12.491,0.02 -12.482,0.49 -12.453,0.98 -12.405,1.468 -12.338,1.954 -12.252,2.437 -12.147,2.916 -12.023,3.391 -11.88,3.86 -11.72,4.324 -11.541,4.78 -11.344,5.23 -11.13,5.671 -10.899,6.104 -10.651,6.527 -10.387,6.94 -10.106,7.343 -9.81,7.734 -9.499,8.113 -9.173,8.479 -8.833,8.833 -8.479,9.173 -8.113,9.499 -7.734,9.81 -7.343,10.106 -6.94,10.387 -6.527,10.651 -6.104,10.899 -5.671,11.13 -5.23,11.344 -4.78,11.541 -4.324,11.72 -3.86,11.88 -3.391,12.023 -2.916,12.147 -2.437,12.252 -1.954,12.338 -1.468,12.405 -0.98,12.453 -0.49,12.482 -0.02,12.491 0,12.49 0.02,12.491
VBUS on Int2 (PWR) (split plane): 0.49,12.482 0.98,12.453 1.468,12.405 1.954,12.338 2.437,12.252 2.916,12.147 3.391,12.023 3.86,11.88 4.324,11.72 4.78,11.541 5.23,11.344 5.671,11.13 6.104,10.899 6.527,10.651 6.75,10.508 6.75,3.583 3.88,3.583 2.227,5.236 2.187,5.266 2.141,5.286 2.091,5.292 1.992,5.292 1.992,9.3 1.986,9.35 1.966,9.396 1.936,9.436 1.536,9.836 1.496,9.866 1.45,9.886 1.4,9.892 -2.2,9.892 -2.25,9.886 -2.296,9.866 -2.336,9.836 -2.751,9.421 -2.781,9.381 -2.8,9.335 -2.807,9.285 -2.807,6 -2.807,5.465 -3.536,4.736 -3.566,4.696 -3.586,4.65 -3.592,4.6 -3.592,3.68 -3.98,3.292 -5.326,3.292 -5.375,3.286 -5.403,3.274 -5.422,3.266 -5.462,3.236 -5.736,2.962 -5.766,2.922 -5.774,2.903 -5.786,2.875 -5.792,2.826 -5.792,2 -5.792,1.618 -5.792,1.28 -6.916,0.156 -8.28,-1.208 -10.63,-1.208 -10.68,-1.214 -10.707,-1.226 -10.726,-1.234 -10.766,-1.264 -11.266,-1.764 -11.297,-1.804 -11.316,-1.85 -11.322,-1.9 -11.322,-2.582 -11.322,-5.275 -11.344,-5.23 -11.541,-4.78 -11.72,-4.324 -11.88,-3.86 -12.023,-3.391 -12.147,-2.916 -12.252,-2.437 -12.338,-1.954 -12.405,-1.468 -12.453,-0.98 -12.482,-0.49 -12.491,-0.02 -12.49,0 -12.491,0.02 -12.482,0.49 -12.453,0.98 -12.405,1.468 -12.338,1.954 -12.252,2.437 -12.147,2.916 -12.023,3.391 -11.88,3.86 -11.72,4.324 -11.541,4.78 -11.344,5.23 -11.13,5.671 -10.899,6.104 -10.651,6.527 -10.387,6.94 -10.106,7.343 -9.81,7.734 -9.499,8.113 -9.173,8.479 -8.833,8.833 -8.479,9.173 -8.113,9.499 -7.734,9.81 -7.343,10.106 -6.94,10.387 -6.527,10.651 -6.104,10.899 -5.671,11.13 -5.23,11.344 -4.78,11.541 -4.324,11.72 -3.86,11.88 -3.391,12.023 -2.916,12.147 -2.437,12.252 -1.954,12.338 -1.468,12.405 -0.98,12.453 -0.49,12.482 -0.02,12.491 0,12.49 0.02,12.491
3V3 on Int2 (PWR) (split plane): 1.536,4.964 1.576,4.934 1.622,4.914 1.672,4.908 1.745,4.908 2.011,4.908 3.664,3.255 3.704,3.224 3.75,3.205 3.8,3.199 6.75,3.199 6.75,-10.4 4.822,-10.4 4.822,-11.147 4.8,-11.17 4.8,-11.532 4.78,-11.541 4.324,-11.72 3.86,-11.88 3.391,-12.023 2.916,-12.147 2.437,-12.252 1.954,-12.338 1.468,-12.405 0.98,-12.453 0.49,-12.482 0.02,-12.491 0,-12.49 -0.02,-12.491 -0.49,-12.482 -0.98,-12.453 -1.468,-12.405 -1.954,-12.338 -2.437,-12.252 -2.916,-12.147 -3.391,-12.023 -3.86,-11.88 -4.324,-11.72 -4.78,-11.541 -5.23,-11.344 -5.671,-11.13 -6.104,-10.899 -6.527,-10.651 -6.94,-10.387 -7.343,-10.106 -7.734,-9.81 -8.113,-9.499 -8.479,-9.173 -8.833,-8.833 -9.173,-8.479 -9.499,-8.113 -9.81,-7.734 -10.106,-7.343 -10.387,-6.94 -10.651,-6.527 -10.899,-6.104 -10.938,-6.031 -10.938,-2.582 -10.938,-1.98 -10.551,-1.592 -8.2,-1.592 -8.15,-1.586 -8.123,-1.574 -8.104,-1.566 -8.064,-1.536 -6.644,-0.116 -5.464,1.064 -5.434,1.104 -5.426,1.123 -5.414,1.15 -5.408,1.2 -5.408,2 -5.408,2.746 -5.246,2.908 -3.9,2.908 -3.85,2.914 -3.804,2.934 -3.764,2.964 -3.264,3.464 -3.234,3.504 -3.214,3.55 -3.208,3.6 -3.208,4.52 -2.479,5.249 -2.42,5.308 1.192,5.308
VBUS_IN on Int2 (PWR) (split plane): 1.608,9.22 1.608,5.436 1.408,5.636 1.368,5.666 1.349,5.674 1.321,5.686 1.272,5.692 -2.423,5.692 -2.423,6 -2.423,9.206 -2.12,9.508 1.32,9.508

## Keep-outs
Keep-Out Layer:
  circle w0.5: c7.5,7.5 r1.25
  circle w0.5: c-7.5,-7.5 r1.25
  circle w0.5: c-7.5,7.5 r1.25

## Other copper
Top Layer:
  pour cut-out: -0.1,-11.593 6.2,-11.593 6.2,-8.393 -0.1,-8.393
  pour cut-out: 3.75,-1.05 6.75,-1.05 6.75,-5.25 3.75,-5.25
  pour cut-out: 6.75,12 13.75,12 13.75,-12 6.75,-12
Bottom Layer:
  pour cut-out: -0.1,-11.6 6.2,-11.6 6.2,-8.4 -0.1,-8.4
  pour cut-out: 6.75,12 13.75,12 13.75,-12 6.75,-12
  text "BS-V1" at -10.6,2.785 h0.64 r270
Int1 (GND) (plane layer: these items are gaps in the copper):
  pour cut-out: 6.75,12 13.75,12 13.75,-12 6.75,-12
Int2 (PWR) (plane layer: these items are gaps in the copper):
  rectangle: -3.385,-10.335 -2.115,-9.065
  pour cut-out: 4.822,-10.4 4.822,-11.147 4.8,-11.17 4.8,-12.2 6.7,-12.2 6.8,-12.2 6.8,-10.4
  pour cut-out: 6.75,12 13.75,12 13.75,-12 6.75,-12
  lines w0.381: -11.13,-6.5 -11.13,-2.582 -11.13,-1.9 -10.63,-1.4 -8.2,-1.4 -6.78,0.02 -5.6,1.2 -5.6,2 ; -5.6,1.618 -5.6,2.826 -5.326,3.1 -3.9,3.1 -3.4,3.6 -3.4,4.6 -2.615,5.385 ; -1.442,9.7 -1.25,9.7 ; 1.8,5.1 1.745,5.1 1.8,5.155 1.8,9.3 1.4,9.7 -1.25,9.7 ; 7,3.391 3.8,3.391 2.091,5.1 1.672,5.1 1.272,5.5 -2.5,5.5 -2.615,5.385 ; -2.615,5.385 -2.615,6 -2.615,9.285 -2.2,9.7 -1.53,9.7 ; -1.53,9.7 -1.25,9.7 ; -1.53,9.7 -1.25,9.7

## Silkscreen, mask and mechanical layers (free items; w line width, h text height)
Bottom Overlay:
  drawing of 376 lines, arcs and shapes, not listed
  text "BS-V1-ASSY" at 8.3,-8.5 h0.64
Mechanical 1:
  circle w0.013: c0,0 r13

## Text inside footprints (layer, text, board x,y; h text height)
J1: Top Overlay "A1" at 4.8,7.7 h0.64
J3: Top Overlay "1" at -9.75,6.75 h0.64 r90
J4: Top Overlay "1" at -3.575,-7.605 h0.64 r90